# EAGLE board PCB_v52 (EAGLE 9.7.0)
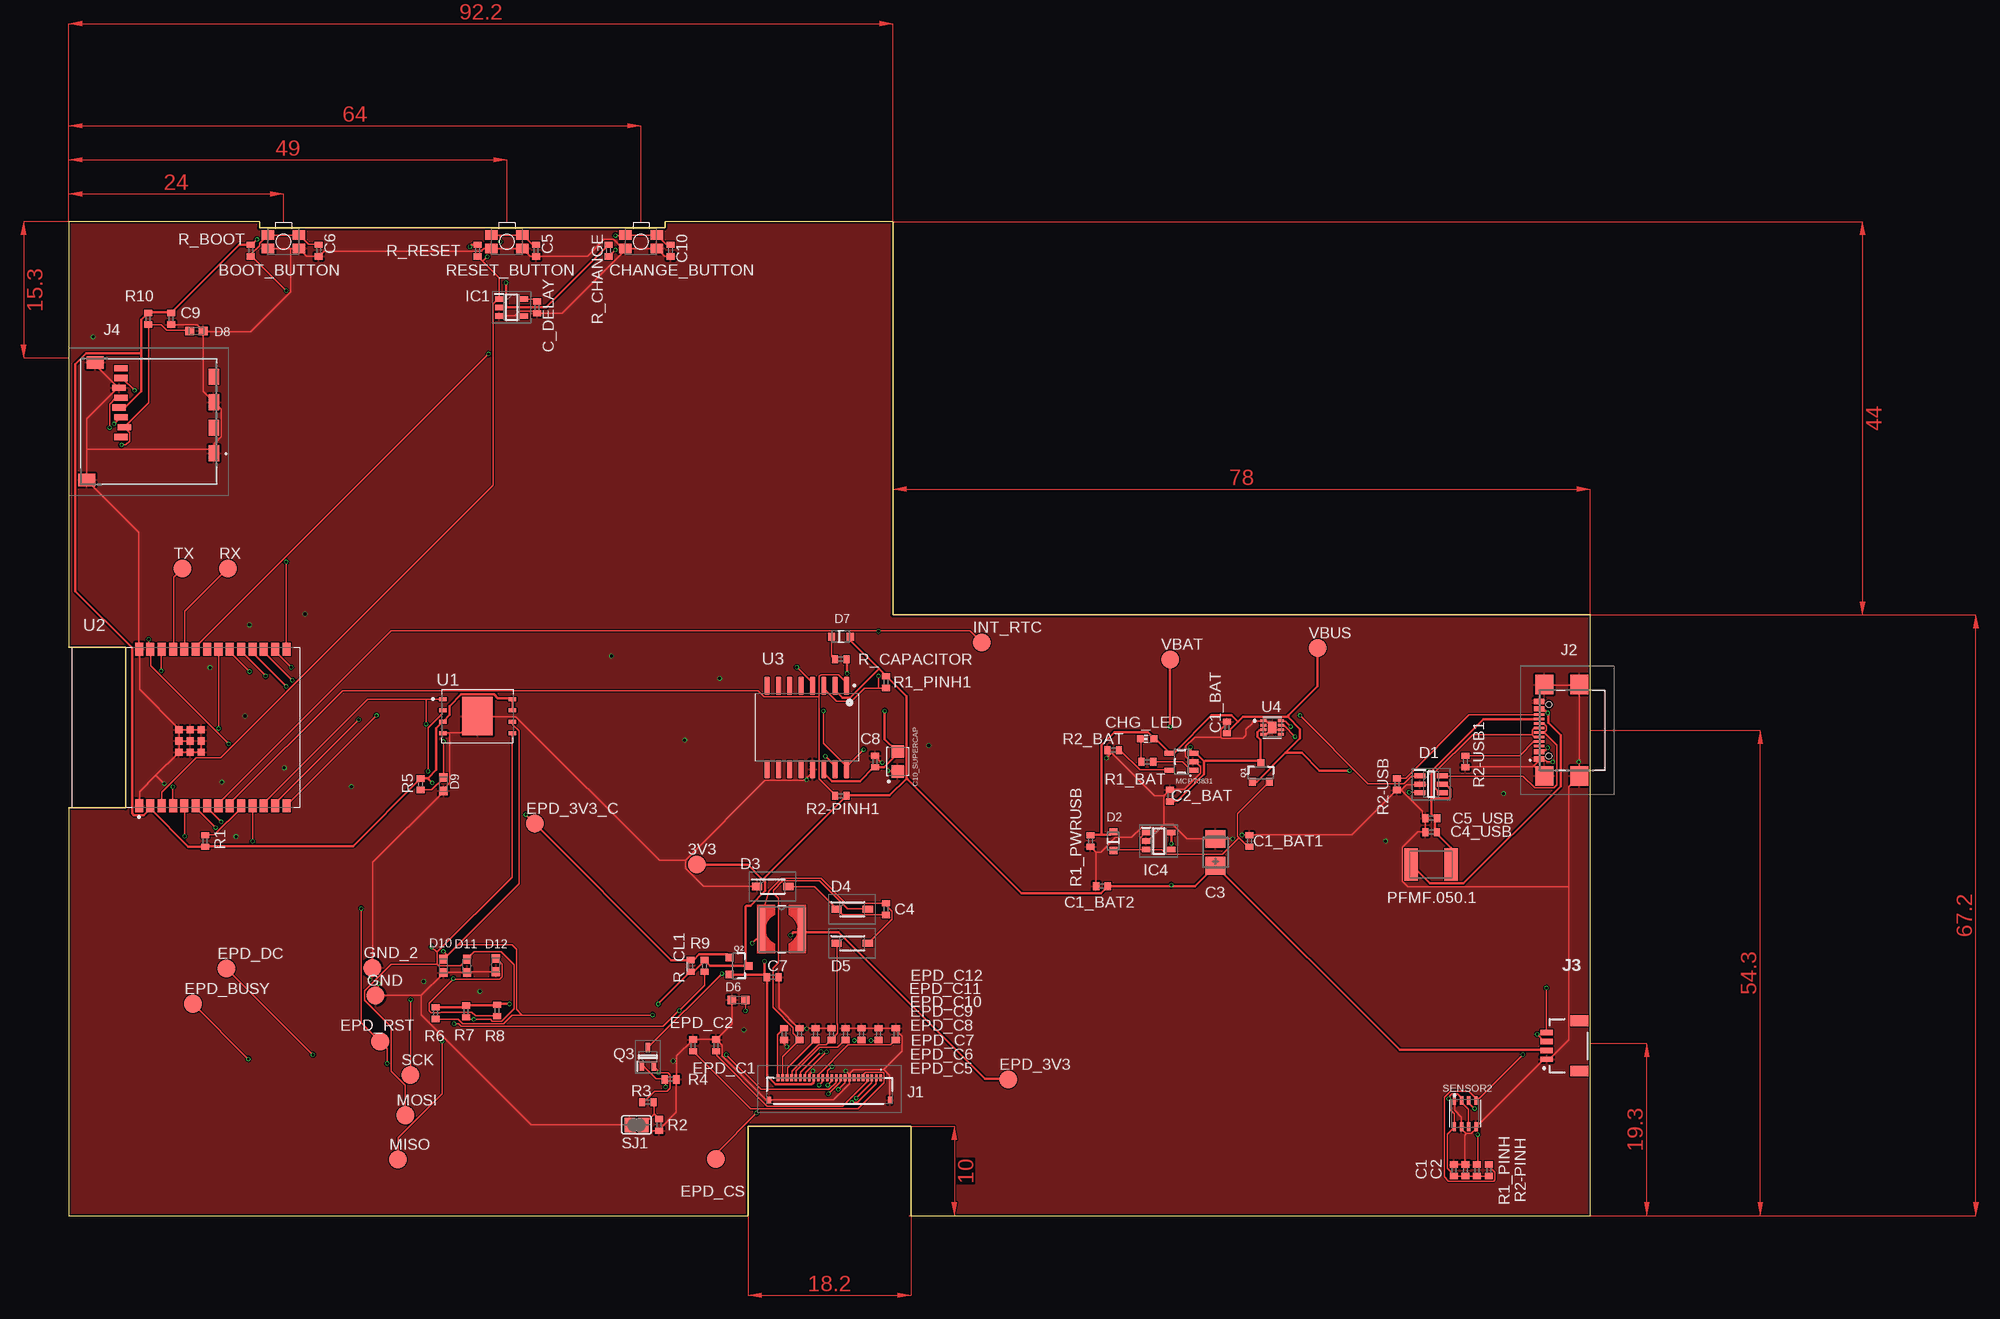
[diagram p0: board, top side]
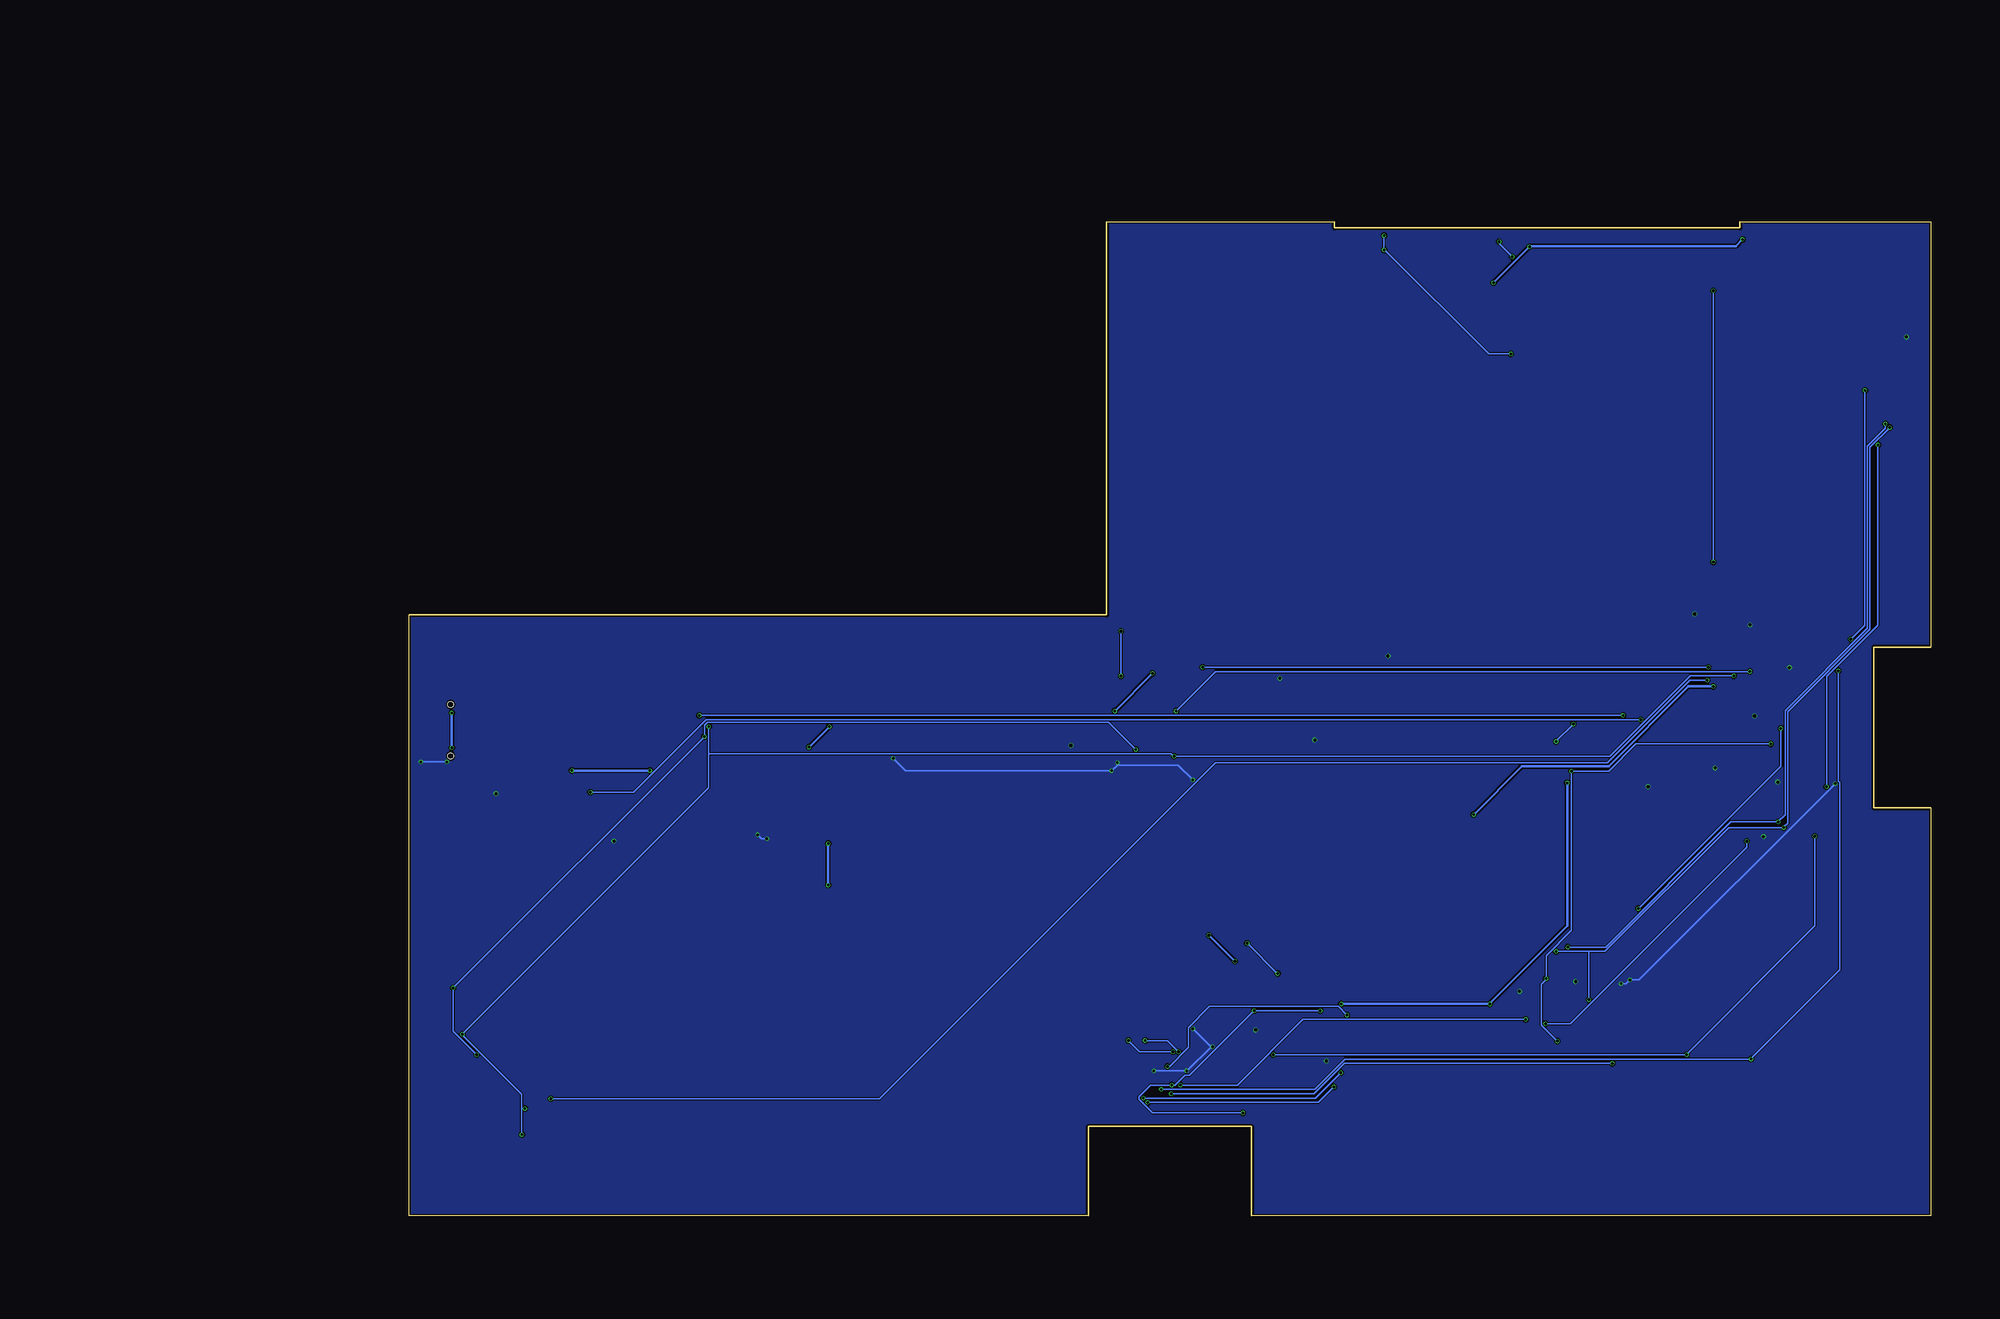
[diagram p1: board, bottom side, seen from below]

Size 170.2 x 111.2 mm. Coordinates in mm from the lower left corner, seen from the top.
Outline: 0,0 76,0 76,10 94.2,10 94.2,0 170.2,0 170.2,67.2 92.2,67.2 92.2,111.2 66.68,111.2 66.68,110.49 21.32,110.49 21.32,111.2 0,111.2 0,63.6 6.35,63.6 6.35,45.62 0,45.62 0,0
Copper layers (1*16): Top 0.035mm / dielectric 1.6mm / Bottom 0.035mm
Design rules "jlcpcb-2layers.dru": minimum track width 0.15mm, minimum drill 0.3mm, track to track 5mil, track to pad 5mil, pad to pad 5mil, via to via 5mil, smd to smd 5mil, copper to edge 0.2mm, drill to drill 6mil, minimum pad ring 10mil, minimum via ring 3mil, stop-mask expansion 4mil, vias tented up to drill 0mil, thermal gap 10mil
Net classes: 1 power: width 0.3 mm

## Footprints (pad centres in the part's own frame; a part is rotated, then mirrored left to right if it is on the bottom)
TP20R = smd 2 x 2: TP 0,0
MYBUTTON = smd 1.4 x 1.05: 1 1.75,0.75; 2 -1.75,0.75; 3 -1.75,-0.75; 4 1.75,-0.75
EAGLE-LTSPICE_C0402 = smd 0.7 x 0.9: 1 -0.65,0; 2 0.65,0
RCL_CT3528 = smd 2 x 2.2: + -1.5,0; - 1.5,0
CAPCP3225X100N = smd 1.4 x 1.4: 1 -1.1,0; 2 1.1,0
ADAFRUIT_CHIP-LED0603 = smd 0.8 x 0.8: A 0,-0.75; C 0,0.75
SOT95P280X145-6N = smd 1.2 x 0.6: 1 -1.25,0.95; 2 -1.25,0; 3 -1.25,-0.95; 4 1.25,-0.95; 5 1.25,0; 6 1.25,0.95
ESP32_WROVER_AVX---SD0805S020S1R0_AVX_SD0805S020S1R0_0 = smd 0.8 x 0.9: 1 -1.05,0; 2 1.05,0
SOD3716X135N = smd 1.15 x 0.8: 1 -1.75,0; 2 1.75,0
DIOC1608X36N = smd 0.97 x 0.94: 1 -0.75,0; 2 0.75,0
SOT95P280X125-5N = smd 0.9 x 0.6: 1 -1.4,0.95; 2 -1.4,0; 3 -1.4,-0.95; 4 1.4,-0.95; 5 1.4,0.95
SOT95P280X120-5N = smd 0.9 x 0.6: 1 -1.4,0.95; 2 -1.4,0; 3 -1.4,-0.95; 4 1.4,-0.95; 5 1.4,0.95
FH34SRJ24S05SH99 = smd 0.3 x 0.8: 1 5.75,1.45; 2 5.25,1.45; 3 4.75,1.45; 4 4.25,1.45; 5 3.75,1.45; 6 3.25,1.45; 7 2.75,1.45; 8 2.25,1.45; 9 1.75,1.45; 10 1.25,1.45; 11 0.75,1.45; 12 0.25,1.45; 13 -0.25,1.45; 14 -0.75,1.45; 15 -1.25,1.45; 16 -1.75,1.45; 17 -2.25,1.45; 18 -2.75,1.45; 19 -3.25,1.45; 20 -3.75,1.45; 21 -4.25,1.45; 22 -4.75,1.45; 23 -5.25,1.45; 24 -5.75,1.45 | smd 0.4 x 0.8: MP1 6.75,-1.05; MP2 -6.75,-1.05
SAMACSYS_PARTS_USB4110GFA = smd 0.3 x 1.15: A1 -3.35,3.678; A4 -2.55,3.678; A5 -1.25,3.678; A6 -0.25,3.678; A7 0.25,3.678; A8 1.25,3.678; A9 2.55,3.678; A12 3.35,3.678; B1 3.05,3.678; B4 2.25,3.678; B5 1.75,3.678; B6 0.75,3.678; B7 -0.75,3.678; B8 -1.75,3.678; B9 -2.25,3.678; B12 -3.05,3.678 | smd 2.18 x 2: MP1 -5.11,-0.827; MP2 5.11,-0.827; MP3 -5.11,3.103; MP4 5.11,3.103 | hole 0.65: -2.89,2.603; 2.89,2.603
JST04_1MM_RA = smd 0.6 x 1.35: 1 -1.5,0; 2 -0.5,0; 3 0.5,0; 4 1.5,0 | smd 1.2 x 2: NC1 2.8,-3.675; NC2 -2.8,-3.675
112ATAARR03ATTEND = smd 1.8 x 1.2: G1 10.6,10.4; G2 4.9,10.4; S1 7.75,10.4; S2 2.05,10.4 | smd 1.4 x 1.9: G3 13.6,-3.85; G4 0.45,-2.85 | smd 0.7 x 1.5: P1 8.8,0; P2 7.7,0.4; P3 6.6,0; P4 5.5,-0.2; P5 4.4,0; P6 3.3,-0.2; P7 2.2,0; P8 1.1,0
IND_4828-WE-TPC_WRE = smd 0.889 x 4.826: 1 -2.286,0; 2 2.286,0
ESP32_WROVER_SPARKFUN-IC-POWER_SOT23-5 = smd 0.55 x 1.2: 1 -0.95,-1.3; 2 0,-1.3; 3 0.95,-1.3; 4 0.95,1.3; 5 -0.95,1.3
ESP32C6_VARISTOR_CT/CN1812 = smd 1.5 x 3.6: 1 -2.25,0; 2 2.25,0
ESP32_WROVER_SPARKFUN-DISCRETESEMI_SOT23-3 = smd 0.8 x 0.9: 1 -0.95,-1; 2 0.95,-1; 3 0,1.1
SOT65P210X110-3N = smd 1.05 x 0.5: 1 -1.05,0.65; 2 -1.05,-0.65; 3 1.05,0
ESP32_WROVER_EAGLE-LTSPICE_R0402 = smd 0.7 x 0.9: 1 -0.65,0; 2 0.65,0
ESP32_WROVER_BME680_PSON80P300X300X100-8N = smd 1.016 x 0.5: 1 1.458,1.2; 2 1.458,0.4; 3 1.458,-0.4; 4 1.458,-1.2; 5 -1.458,-1.22; 6 -1.458,-0.4; 7 -1.458,0.4; 8 -1.458,1.2
SJ = smd 1.168 x 1.6: 1 -0.762,0; 2 0.762,0
SON127P600X800X80-9N = smd 0.94 x 0.44: 1 -3.895,1.905; 2 -3.895,0.635; 3 -3.895,-0.635; 4 -3.895,-1.905; 5 3.895,-1.905; 6 3.895,-0.635; 7 3.895,0.635; 8 3.895,1.905 | smd 3.4 x 4.3: 9 0,0
XCVR_ESP32-C6-WROOM-1-N8 = smd 1.5 x 0.9: 1 -8.75,5.26; 2 -8.75,3.99; 3 -8.75,2.72; 4 -8.75,1.45; 5 -8.75,0.18; 6 -8.75,-1.09; 7 -8.75,-2.36; 8 -8.75,-3.63; 9 -8.75,-4.9; 10 -8.75,-6.17; 11 -8.75,-7.44; 12 -8.75,-8.71; 13 -8.75,-9.98; 14 -8.75,-11.25; 15 8.75,-11.25; 16 8.75,-9.98; 17 8.75,-8.71; 18 8.75,-7.44; 19 8.75,-6.17; 20 8.75,-4.9; 21 8.75,-3.63; 22 8.75,-2.36; 23 8.75,-1.09; 24 8.75,0.18; 25 8.75,1.45; 26 8.75,2.72; 27 8.75,3.99; 28 8.75,5.26 | smd 0.8 x 0.8: 29_1 -2.755,0.79; 29_2 -1.505,0.79; 29_3 -0.255,0.79; 29_4 -2.755,-0.46; 29_5 -1.505,-0.46; 29_6 -0.255,-0.46; 29_7 -2.755,-1.71; 29_8 -1.505,-1.71; 29_9 -0.255,-1.71
SOIC127P1032X265-16N = smd 2.05 x 0.59: 1 -4.655,4.445; 2 -4.655,3.175; 3 -4.655,1.905; 4 -4.655,0.635; 5 -4.655,-0.635; 6 -4.655,-1.905; 7 -4.655,-3.175; 8 -4.655,-4.445; 9 4.655,-4.445; 10 4.655,-3.175; 11 4.655,-1.905; 12 4.655,-0.635; 13 4.655,0.635; 14 4.655,1.905; 15 4.655,3.175; 16 4.655,4.445
SON50P200X200X80-9N = smd 0.76 x 0.27: 1 -0.985,0.75; 4 -0.985,-0.75; 5 0.985,-0.75; 6 0.985,-0.25; 7 0.985,0.25; 8 0.985,0.75 | smd 0.785 x 0.302: 2 -0.985,0.25 | smd 0.787 x 0.305: 3 -0.985,-0.25 | smd 0.9 x 1.3: 9 0,0

## Placement (x,y rotation side)
3V3  TPTP20R  [TP20R]  70.24,39.31 0 top
BOOT_BUTTON  BUTTON_CUSYOMV1  [MYBUTTON]  24,108.94 180 top
C1  100nF  [EAGLE-LTSPICE_C0402]  154.94,5.08 90 top
C1_BAT  4.7uF  [EAGLE-LTSPICE_C0402]  129.54,54.61 90 top
C1_BAT1  4.7uF  [EAGLE-LTSPICE_C0402]  132.08,41.91 90 top
C1_BAT2  4.7uF  [EAGLE-LTSPICE_C0402]  115.57,36.83 180 top
C2  100nF  [EAGLE-LTSPICE_C0402]  156.21,5.08 90 top
C2_BAT  4.7uF  [EAGLE-LTSPICE_C0402]  123.19,46.99 90 top
C3  100uF TANT  [RCL_CT3528]  128.27,40.64 90 top
C4  4.7uF/25V  [EAGLE-LTSPICE_C0402]  91.44,34.29 90 top
C4_USB  100nF  [EAGLE-LTSPICE_C0402]  152.4,42.87 180 top
C5  1uF  [EAGLE-LTSPICE_C0402]  52.27,107.95 270 top
C5_USB  4.7uF  [EAGLE-LTSPICE_C0402]  152.42,44.45 180 top
C6  100nF  [EAGLE-LTSPICE_C0402]  27.94,107.95 270 top
C7  10uF  [EAGLE-LTSPICE_C0402]  78.74,26.67 0 top
C8  100nF  [EAGLE-LTSPICE_C0402]  90.17,50.8 90 top
C9  100nF  [EAGLE-LTSPICE_C0402]  11.43,100.33 270 top
C10  100nF  [EAGLE-LTSPICE_C0402]  67.31,107.95 270 top
C10_SUPERCAP  CPH3225A  [CAPCP3225X100N]  92.71,50.8 90 top
C_DELAY  100nF  [EAGLE-LTSPICE_C0402]  52.37,101.6 270 top
CHANGE_BUTTON  BUTTON_CUSYOMV1  [MYBUTTON]  64,108.94 180 top
CHG_LED  [ADAFRUIT_CHIP-LED0603]  120.65,53.34 90 top
D1  USBLC6-2SC6Y  [SOT95P280X145-6N]  152.4,48.26 0 top
D2  ESP32_WROVER_AVX---SD0805S020S1R0_AVX_SD0805S020S1R0_0_0AVX_SD0805S020S1R0_0_0  [ESP32_WROVER_AVX---SD0805S020S1R0_AVX_SD0805S020S1R0_0]  116.84,41.91 90 top
D3  MBR0530  [SOD3716X135N]  78.74,36.83 0 top
D4  MBR0530  [SOD3716X135N]  87.63,34.29 0 top
D5  MBR0530  [SOD3716X135N]  87.63,30.48 0 top
D6  PGB1010603MR  [DIOC1608X36N]  74.93,24.13 0 top
D7  ESP32_WROVER_AVX---SD0805S020S1R0_AVX_SD0805S020S1R0_0_0AVX_SD0805S020S1R0_0_0  [ESP32_WROVER_AVX---SD0805S020S1R0_AVX_SD0805S020S1R0_0]  86.36,64.77 0 top
D8  PGB1010603MR  [DIOC1608X36N]  14.27,98.96 180 top
D9  PGB1010603MR  [DIOC1608X36N]  41.91,48.26 90 top
D10  PGB1010603MR  [DIOC1608X36N]  41.91,27.94 90 top
D11  PGB1010603MR  [DIOC1608X36N]  44.55,27.94 90 top
D12  PGB1010603MR  [DIOC1608X36N]  47.79,28.04 90 top
EPD_3V3  TPTP20R  [TP20R]  105.07,15.24 0 top
EPD_3V3_C  TPTP20R  [TP20R]  52.13,43.86 0 top
EPD_BUSY  TPTP20R  [TP20R]  13.9,23.71 0 top
EPD_C1  1uF/50V  [EAGLE-LTSPICE_C0402]  72.39,19.05 90 top
EPD_C2  1uF/50V  [EAGLE-LTSPICE_C0402]  69.85,19.05 90 top
EPD_C5  0.1uF/50V  [EAGLE-LTSPICE_C0402]  92.51,20.32 90 top
EPD_C6  1uF/50V  [EAGLE-LTSPICE_C0402]  90.57,20.32 90 top
EPD_C7  1uF/50V  [EAGLE-LTSPICE_C0402]  88.7,20.32 90 top
EPD_C8  1uF/50V  [EAGLE-LTSPICE_C0402]  86.87,20.32 90 top
EPD_C9  1uF/50V  [EAGLE-LTSPICE_C0402]  85.3,20.32 90 top
EPD_C10  1uF/50V  [EAGLE-LTSPICE_C0402]  83.55,20.32 90 top
EPD_C11  1uF/50V  [EAGLE-LTSPICE_C0402]  81.72,20.32 90 top
EPD_C12  1uF/50V  [EAGLE-LTSPICE_C0402]  80.01,20.32 90 top
EPD_CS  TPTP20R  [TP20R]  72.39,6.35 0 top
EPD_DC  TPTP20R  [TP20R]  17.6,27.64 0 top
EPD_RST  TPTP20R  [TP20R]  34.82,19.51 0 top
GND  TPTP20R  [TP20R]  34.31,24.63 0 top
GND_2  TPTP20R  [TP20R]  33.95,27.73 0 top
IC1  BD5229G-TR  [SOT95P280X125-5N]  49.53,101.6 0 top
IC4  XC6220A331MR-G  [SOT95P280X120-5N]  121.92,41.91 0 top
INT_RTC  TPTP20R  [TP20R]  102.13,64.13 0 top
J1  FH34SRJ-24S-0.5SH_99_  [FH34SRJ24S05SH99]  85.09,13.97 0 top
J2  SAMACSYS_PARTS_USB4110-GF-A  [SAMACSYS_PARTS_USB4110GFA]  168.17,54.3 90 top
J3  QWIIC_RIGHT_ANGLE  [JST04_1MM_RA]  165.32,19 90 top
J4  112A-TAAR-R03_ATTEND  [112ATAARR03ATTEND]  5.82,95.9 270 top
L1  68uH  [IND_4828-WE-TPC_WRE]  79.74,32.05 0 top
MCP73831  ESP32_WROVER_SPARKFUN-IC-POWER_MCP73831  [ESP32_WROVER_SPARKFUN-IC-POWER_SOT23-5]  124.46,50.8 90 top
MISO  TPTP20R  [TP20R]  36.81,6.28 0 top
MOSI  TPTP20R  [TP20R]  37.62,11.24 0 top
PFMF.050.1  ESP32C6_VARISTORCN1812  [ESP32C6_VARISTOR_CT/CN1812]  152.4,39.3 0 top
Q1  20V/4.2A/52mΩ/1.4W  [ESP32_WROVER_SPARKFUN-DISCRETESEMI_SOT23-3]  133.35,49.53 0 top
Q2  20V/4.2A/52mΩ/1.4W  [ESP32_WROVER_SPARKFUN-DISCRETESEMI_SOT23-3]  74.93,27.94 270 top
Q3  SI1308EDL-T1-GE3  [SOT65P210X110-3N]  64.77,17.78 90 top
R1  10k  [ESP32_WROVER_EAGLE-LTSPICE_R0402]  15.24,41.91 270 top
R1_BAT  200  [ESP32_WROVER_EAGLE-LTSPICE_R0402]  120.65,50.8 0 top
R1_PINH  10k  [ESP32_WROVER_EAGLE-LTSPICE_R0402]  157.54,5.08 270 top
R1_PINH1  10k  [ESP32_WROVER_EAGLE-LTSPICE_R0402]  91.44,59.69 90 top
R1_PWRUSB  100k  [ESP32_WROVER_EAGLE-LTSPICE_R0402]  114.3,41.91 90 top
R2  2.2  [ESP32_WROVER_EAGLE-LTSPICE_R0402]  66.04,10.16 90 top
R2-PINH  10k  [ESP32_WROVER_EAGLE-LTSPICE_R0402]  158.87,5.08 270 top
R2-PINH1  10k  [ESP32_WROVER_EAGLE-LTSPICE_R0402]  86.36,46.99 0 top
R2-USB  5k1  [ESP32_WROVER_EAGLE-LTSPICE_R0402]  148.59,48.26 270 top
R2-USB1  5K1  [ESP32_WROVER_EAGLE-LTSPICE_R0402]  156.21,50.8 90 top
R2_BAT  2k  [ESP32_WROVER_EAGLE-LTSPICE_R0402]  116.84,52.07 0 top
R3  0.47  [ESP32_WROVER_EAGLE-LTSPICE_R0402]  64.77,12.7 180 top
R4  10k  [ESP32_WROVER_EAGLE-LTSPICE_R0402]  67.31,15.24 180 top
R5  10K  [ESP32_WROVER_EAGLE-LTSPICE_R0402]  39.37,48.26 90 top
R6  10K  [ESP32_WROVER_EAGLE-LTSPICE_R0402]  41.01,22.66 90 top
R7  10K  [ESP32_WROVER_EAGLE-LTSPICE_R0402]  44.45,22.86 90 top
R8  10K  [ESP32_WROVER_EAGLE-LTSPICE_R0402]  47.89,22.96 90 top
R9  10K  [ESP32_WROVER_EAGLE-LTSPICE_R0402]  71.12,27.94 90 top
R10  10K  [ESP32_WROVER_EAGLE-LTSPICE_R0402]  8.89,100.33 90 top
R_BOOT  10k  [ESP32_WROVER_EAGLE-LTSPICE_R0402]  20.32,107.95 90 top
R_CAPACITOR  15  [ESP32_WROVER_EAGLE-LTSPICE_R0402]  86.36,62.23 0 top
R_CHANGE  10k  [ESP32_WROVER_EAGLE-LTSPICE_R0402]  60.4,107.95 90 top
R_CL1  10k  [ESP32_WROVER_EAGLE-LTSPICE_R0402]  69.54,27.94 270 top
R_RESET  10k  [ESP32_WROVER_EAGLE-LTSPICE_R0402]  45.72,107.95 90 top
RESET_BUTTON  BUTTON_CUSYOMV1  [MYBUTTON]  49,108.94 180 top
RX  TPTP20R  [TP20R]  17.78,72.39 0 top
SCK  TPTP20R  [TP20R]  38.22,15.75 0 top
SENSOR2  ESP32_WROVER_BME680_BME680  [ESP32_WROVER_BME680_PSON80P300X300X100-8N]  156.21,11.43 90 top
SJ1  [SJ]  63.5,10.16 0 top
TX  TPTP20R  [TP20R]  12.7,72.39 0 top
U1  W25Q512JVEIQ  [SON127P600X800X80-9N]  45.72,55.88 0 top
U2  ESP32-C6-WROOM-1-N8  [XCVR_ESP32-C6-WROOM-1-N8]  13.1,54.61 90 top
U3  DS3231SN#  [SOIC127P1032X265-16N]  82.55,54.61 270 top
U4  MAX17048G+T10  [SON50P200X200X80-9N]  134.62,54.61 0 top
VBAT  TPTP20R  [TP20R]  123.19,62.23 0 top
VBUS  TPTP20R  [TP20R]  139.7,63.5 0 top

## Library data of the parts
3V3 BOOT_BUTTON CHANGE_BUTTON CHG_LED EPD_3V3 EPD_3V3_C EPD_BUSY EPD_CS EPD_DC EPD_RST GND GND_2 INT_RTC MISO MOSI PFMF.050.1 RESET_BUTTON RX SCK SJ1 TX VBAT VBUS = DeskAssistant v19 v1
C1 C1_BAT C1_BAT1 C1_BAT2 C2 C2_BAT C4 C4_USB C5 C5_USB C6-C10 C_DELAY EPD_C1 EPD_C2 EPD_C5-EPD_C12 = DeskAssistant v19 v1; SPICEMODEL: NONE; SPICEPREFIX: C
C3 = DeskAssistant v19 v1; SPICEPREFIX: C
C10_SUPERCAP = DeskAssistant v19 v1; AVAILABILITY: Not in stock; CHECK_PRICES: https://www.snapeda.com/parts/CPH3225A/Seiko+Instruments/view-part/?ref=eda; DESCRIPTION: 11 mF (EDLC) Supercapacitor 3.3 V 1210 (3225 Metric) - -; MF: Seiko Instruments; MP: CPH3225A; PACKAGE: 1210 Seiko; PRICE: None; PURCHASE-URL: https://www.snapeda.com/api/url_track_click_mouser/?unipart_id=562593&manufacturer=Seiko Instruments&part_name=CPH3225A&search_term=None; SNAPEDA_LINK: https://www.snapeda.com/parts/CPH3225A/Seiko+Instruments/view-part/?ref=snap
D1 = DeskAssistant v19 v1; AVAILABILITY: In Stock; CHECK_PRICES: https://www.snapeda.com/parts/USBLC6-2SC6Y/STMicroelectronics/view-part/?ref=eda; DESCRIPTION: 17V Clamp 5A (8/20µs) Ipp Tvs Diode Surface Mount SOT-23-6; MF: STMicroelectronics; MP: USBLC6-2SC6Y; PACKAGE: SOT-23-6 STMicroelectronics; PRICE: None; SNAPEDA_LINK: https://www.snapeda.com/parts/USBLC6-2SC6Y/STMicroelectronics/view-part/?ref=snap
D2 D7 = DeskAssistant v19 v1; CENTROID_NOT_SPECIFIED: No; DATASHEET: http://datasheets.avx.com/schottky.pdf; DIGIKEY_DESCRIPTION: DIODE SCHOTTKY 20V 1A 0805; DIGIKEY_PART_NUMBER: 478-7800-1-ND; LEAD_FREE: yes; MF: AVX; MOUSER_PART_NUMBER: 581-SD0805S020S1R0; PACKAGE: 0805 (2012 metric); PREFIX: D; ROHS: yes; TEMPERATURE_RANGE_HIGH: +125°C; TEMPERATURE_RANGE_LOW: -55°C
D3-D5 = DeskAssistant v19 v1; AVAILABILITY: In Stock; CHECK_PRICES: https://www.snapeda.com/parts/MBR0530/Onsemi/view-part/?ref=eda; DESCRIPTION: Diode Schottky 30 V 500mA Surface Mount SOD-123; MF: ON Semiconductor; MP: MBR0530; PACKAGE: SOD-123-2 ON Semiconductor; PRICE: None; PURCHASE-URL: https://www.snapeda.com/api/url_track_click_mouser/?unipart_id=179458&manufacturer=ON Semiconductor&part_name=MBR0530&search_term=None; SNAPEDA_LINK: https://www.snapeda.com/parts/MBR0530/Onsemi/view-part/?ref=snap
D6 D8-D12 = DeskAssistant v19 v1; AVAILABILITY: In Stock; CHECK_PRICES: https://www.snapeda.com/parts/PGB1010603MR/Littelfuse/view-part/?ref=eda; DESCRIPTION: 150V (Typ) Clamp - Ipp Tvs Diode Surface Mount 0603 (1608 Metric); MF: Littelfuse Inc.; MP: PGB1010603MR; PACKAGE: 0603 Littelfuse Inc.; PRICE: None; PURCHASE-URL: https://www.snapeda.com/api/url_track_click_mouser/?unipart_id=5659453&manufacturer=Littelfuse Inc.&part_name=PGB1010603MR&search_term=None; SNAPEDA_LINK: https://www.snapeda.com/parts/PGB1010603MR/Littelfuse/view-part/?ref=snap
IC1 = DeskAssistant v19 v1; DESCRIPTION: Voltage Detector with Adjustable Delay Time: CMOS processes are utilized to develop high precision, low current consumption CMOS reset ICs that allow arbitrary setting of the delay time. The extensive lineup includes both Nch Open Drain and CMOS output types in a wide range of detection voltages (from 2.3V to 6.0V, in 0.1V steps), enabling selection of the ideal solution based on customer requirements. In addition, the entire series is of course both lead-free and RoHS-compliant.; HEIGHT: 1.25mm; MANUFACTURER_NAME: ROHM Semiconductor; MANUFACTURER_PART_NUMBER: BD5229G-TR; MOUSER_PART_NUMBER: 755-BD5229G-TR; MOUSER_PRICE-STOCK: https://www.mouser.co.uk/ProductDetail/ROHM-Semiconductor/BD5229G-TR?qs=4kLU8WoGk0vvnhrrYwdszw%3D%3D
IC4 = DeskAssistant v19 v1; DESCRIPTION: LDO Voltage Regulators; HEIGHT: 1.2mm; MANUFACTURER_NAME: Torex; MANUFACTURER_PART_NUMBER: XC6220A331MR-G; MOUSER_PART_NUMBER: 865-XC6220A331MR-G; MOUSER_PRICE-STOCK: https://www.mouser.co.uk/ProductDetail/Torex-Semiconductor/XC6220A331MR-G?qs=AsjdqWjXhJ8ZSWznL1J0gg%3D%3D
J1 = DeskAssistant v19 v1; DESCRIPTION: 24 Position FFC, FPC Connector Contacts, Top and Bottom 0.020" (0.50mm) Surface Mount, Right Angle; HEIGHT: 1.1mm; MANUFACTURER_NAME: Hirose; MANUFACTURER_PART_NUMBER: FH34SRJ-24S-0.5SH(99); MOUSER_PART_NUMBER: 798-FH34SRJ24S05SH99; MOUSER_PRICE-STOCK: https://www.mouser.co.uk/ProductDetail/Hirose-Connector/FH34SRJ-24S-0.5SH99?qs=vcbW%252B4%252BSTIpKBl5ap9J8Fw%3D%3D
J2 = DeskAssistant v19 v1; DESCRIPTION: CONN USB 2.0 TYPE-C R/A SMT; HEIGHT: 3.26mm; MANUFACTURER_NAME: GCT (GLOBAL CONNECTOR TECHNOLOGY); MANUFACTURER_PART_NUMBER: USB4110-GF-A; MOUSER_PART_NUMBER: 640-USB4110-GF-A; MOUSER_PRICE-STOCK: https://www.mouser.co.uk/ProductDetail/GCT/USB4110-GF-A?qs=KUoIvG%2F9IlYiZvIXQjyJeA%3D%3D
J3 = DeskAssistant v19 v1; PROD_ID: CONN-13694
J4 = DeskAssistant v19 v1; DESCRIPTION: Micro SD Card Socket, Push-Push Type, Top Mount, SMT, H=1.83mm, 10u; HEIGHT: 1.9mm; MANUFACTURER_NAME: ATTEND; MANUFACTURER_PART_NUMBER: 112A-TAAR-R03 ATTEND
L1 = DeskAssistant v19 v1; COPYRIGHT: Copyright (C) 2024 Ultra Librarian. All rights reserved.; MANUFACTURER_PART_NUMBER: 744043680; MFR_NAME: Wurth Electronics
MCP73831 = DeskAssistant v19 v1; PROD_ID: IC-09995
Q1 Q2 = DeskAssistant v19 v1; PROD_ID: TRAN-14388
Q3 = DeskAssistant v19 v1; AVAILABILITY: In Stock; CHECK_PRICES: https://www.snapeda.com/parts/SI1308EDL-T1-GE3/Vishay+Siliconix/view-part/?ref=eda; DESCRIPTION: Si1308EDL-T1-GE3 N-channel MOSFET Transistor, 1.5 A, 30 V, 3-Pin SC-70 | Siliconix / Vishay SI1308EDL-T1-GE3; MF: Vishay Siliconix; MP: SI1308EDL-T1-GE3; PACKAGE: SOT-323 Vishay Semiconductor; PRICE: None; PURCHASE-URL: https://www.snapeda.com/api/url_track_click_mouser/?unipart_id=274603&manufacturer=Vishay Siliconix&part_name=SI1308EDL-T1-GE3&search_term=None; SNAPEDA_LINK: https://www.snapeda.com/parts/SI1308EDL-T1-GE3/Vishay+Siliconix/view-part/?ref=snap
R1 R1_BAT R1_PINH R1_PINH1 R1_PWRUSB R2 R2-PINH R2-PINH1 R2-USB R2-USB1 R2_BAT R3-R10 R_BOOT R_CAPACITOR R_CHANGE R_CL1 R_RESET = DeskAssistant v19 v1; SPICEMODEL: NONE; SPICEPREFIX: R
SENSOR2 = DeskAssistant v19 v1; AVAILABILITY: Unavailable; DESCRIPTION: Integrated Environmental Unit; MF: Bosch Sensortec; MP: BME680; PACKAGE: LGA-8 Bosch Tools; PRICE: None
U1 = DeskAssistant v19 v1; AVAILABILITY: In Stock; CHECK_PRICES: https://www.snapeda.com/parts/W25Q512JVEIQ/Winbond+Electronics/view-part/?ref=eda; DESCRIPTION: FLASH - NOR Memory IC 512Mb (64M x 8) SPI - Quad I/O 133 MHz 8-WSON (8x6); MF: Winbond Electronics; MP: W25Q512JVEIQ; PACKAGE: Package; PRICE: None; SNAPEDA_LINK: https://www.snapeda.com/parts/W25Q512JVEIQ/Winbond+Electronics/view-part/?ref=snap
U2 = DeskAssistant v19 v1; AVAILABILITY: In Stock; CHECK_PRICES: https://www.snapeda.com/parts/ESP32-C6-WROOM-1-N8/Espressif+Systems/view-part/?ref=eda; DESCRIPTION: Multiprotocol Modules ESP32-C6 module, Wi-Fi 6 in 2.4 GHz band, Bluetooth 5, Zigbee 3.0 and Thread. ESP34-WROOM Compatible - ENGINEERING SAMPLE; MF: Espressif Systems; MP: ESP32-C6-WROOM-1-N8; PACKAGE: None; PRICE: None; SNAPEDA_LINK: https://www.snapeda.com/parts/ESP32-C6-WROOM-1-N8/Espressif+Systems/view-part/?ref=snap
U3 = DeskAssistant v19 v1; AVAILABILITY: In Stock; CHECK_PRICES: https://www.snapeda.com/parts/DS3231SN%23/Analog+Devices/view-part/?ref=eda; DESCRIPTION: Extremely Accurate I²C-Integrated RTC/TCXO/Crystal; MF: Analog Devices; MP: DS3231SN#; PACKAGE: SOIC-16 Maxim; PRICE: None; PURCHASE-URL: https://www.snapeda.com/api/url_track_click_mouser/?unipart_id=99048&manufacturer=Analog Devices&part_name=DS3231SN#&search_term=None; SNAPEDA_LINK: https://www.snapeda.com/parts/DS3231SN%23/Analog+Devices/view-part/?ref=snap
U4 = DeskAssistant v19 v1; AVAILABILITY: In Stock; CHECK_PRICES: https://www.snapeda.com/parts/MAX17048G+T10/Analog+Devices/view-part/?ref=eda; DESCRIPTION: 3µA 1-Cell/2-Cell Fuel Gauge with ModelGauge; MF: Analog Devices; MP: MAX17048G+T10; PACKAGE: TDFN-8 Maxim; PRICE: None; PURCHASE-URL: https://www.snapeda.com/api/url_track_click_mouser/?unipart_id=329239&manufacturer=Analog Devices&part_name=MAX17048G+T10&search_term=None; SNAPEDA_LINK: https://www.snapeda.com/parts/MAX17048G+T10/Analog+Devices/view-part/?ref=snap

## Nets
3V3 [power]: 3V3.TP C1_BAT2.1 C3.+ C9.1 D7.2 IC1.2 IC4.5 J3.2 J4.P4 Q2.3 R1.2 R1_PINH1.2 R2-PINH1.2 R5.2 R6.2 R7.2 R8.2 R9.2 R10.2 R_BOOT.2 R_CHANGE.2 R_CL1.2 R_RESET.2 U1.3 U1.7 U1.8 U2.2 U3.2
32KHZ: R2-PINH1.1 U2.9 U3.1
DN: D1.4 J2.A7 J2.B7
DP: D1.6 J2.A6 J2.B6
EPD_3V3 [power]: C7.1 EPD_3V3.TP J1.16 L1.2 Q2.2
EPD_3V3_C [power]: EPD_3V3_C.TP Q2.1 R_CL1.1 U2.18
EPD_BUSY: EPD_BUSY.TP J1.9 U2.26
EPD_CS: D6.2 EPD_CS.TP J1.12 R9.1 U2.11
EPD_DC: EPD_DC.TP J1.11 U2.5
EPD_RST: EPD_RST.TP J1.10 U2.21
FLASH_CS: D9.2 R5.1 U1.1 U2.12
GDR: J1.2 Q3.1 R4.2
GND: BOOT_BUTTON.1 BOOT_BUTTON.2 C1.2 C1_BAT1.2 C1_BAT2.2 C1_BAT.2 C2.2 C2_BAT.2 C3.- C4_USB.2 C5.2 C5_USB.2 C6.2 C7.2 C8.2 C9.2 C10.2 C10_SUPERCAP.1 C_DELAY.2 CHANGE_BUTTON.1 CHANGE_BUTTON.2 D1.2 D3.1 D6.1 D8.1 D9.1 D10.1 D11.1 D12.1 EPD_C1.2 EPD_C2.2 EPD_C5.2 EPD_C6.2 EPD_C7.2 EPD_C8.2 EPD_C9.2 EPD_C10.2 EPD_C11.2 EPD_C12.1 GND.TP GND_2.TP IC1.3 IC4.2 J1.8 J1.17 J1.MP1 J1.MP2 J2.A1 J2.A12 J2.B1 J2.B12 J2.MP1 J2.MP2 J2.MP3 J2.MP4 J3.1 J4.G1 J4.G2 J4.G3 J4.G4 J4.P6 MCP73831.2 R1_PWRUSB.1 R2-USB1.1 R2-USB.2 R2.1 R2_BAT.1 R4.1 RESET_BUTTON.1 RESET_BUTTON.2 SENSOR2.1 SENSOR2.5 SENSOR2.7 SJ1.1 U1.4 U1.9 U2.1 U2.28 U2.29_1 U2.29_2 U2.29_3 U2.29_4 U2.29_5 U2.29_6 U2.29_7 U2.29_8 U2.29_9 U3.13 U4.1 U4.4 U4.6 U4.9
GPIO8: R1.1 U2.10
I2C_PW: C1.1 C2.1 R1_PINH.2 R2-PINH.2 SENSOR2.2 SENSOR2.6 SENSOR2.8 U2.17
INT_RTC: INT_RTC.TP R1_PINH1.1 U2.8 U3.3
IO/BOOT: BOOT_BUTTON.3 BOOT_BUTTON.4 C6.1 R_BOOT.1 U2.15
IO/CHANGE: C10.1 CHANGE_BUTTON.3 CHANGE_BUTTON.4 R_CHANGE.1 U2.23
MISO: D12.2 J4.P7 MISO.TP R8.1 U1.2 U2.27
MOSI: D11.2 J1.14 J4.P3 MOSI.TP R7.1 U1.5 U2.7
N$1: C_DELAY.1 IC1.5
N$2: J2.B5 R2-USB.1
N$3: J2.A5 R2-USB1.2
N$5: D7.1 R_CAPACITOR.1
N$6: C1_BAT1.1 D2.1 IC4.1 IC4.3 Q1.2
N$9: MCP73831.1 R1_BAT.2
N$10: CHG_LED.C R1_BAT.1
N$11: C4.1 D3.2 D4.1
N$12: MCP73831.5 R2_BAT.2
N$13: EPD_C12.2 J1.24
N$15: EPD_C10.1 J1.22
N$17: EPD_C8.1 J1.20
N$18: EPD_C7.1 J1.19
N$19: EPD_C6.1 J1.18
N$20: EPD_C5.1 J1.15
N$21: EPD_C1.1 J1.4
N$22: EPD_C2.1 J1.5
PREVGH: D5.1 EPD_C9.1 J1.21
PREVGL: D4.2 EPD_C11.1 J1.23
RESE: J1.3 Q3.2 R3.2
RESE': R2.2 R3.1 SJ1.2
RESET: C5.1 IC1.1 R_RESET.1 RESET_BUTTON.3 RESET_BUTTON.4 U2.3
RTC_RST: U2.16 U3.4
RX: RX.TP U2.24
SCK: D10.2 J1.13 J4.P5 R6.1 SCK.TP U1.6 U2.6
SCL: J3.4 R2-PINH.1 SENSOR2.4 U2.20 U3.16 U4.7
SDA: J3.3 R1_PINH.1 SENSOR2.3 U2.19 U3.15 U4.8
SRC: C4.2 D5.2 L1.1 Q3.3
SS_SD: D8.2 J4.P2 R10.1 U2.4
TX: TX.TP U2.25
USB_D+: D1.1 U2.14
USB_D-: D1.3 U2.13
VBAT [power]: C2_BAT.1 MCP73831.3 Q1.3 U4.2 U4.3 VBAT.TP
VBUS [power]: C1_BAT.1 C4_USB.1 C5_USB.1 CHG_LED.A D1.5 D2.2 J2.A8 MCP73831.4 PFMF.050.1.2 Q1.1 R1_PWRUSB.2 VBUS.TP
VRTC [power]: C8.1 C10_SUPERCAP.2 R_CAPACITOR.2 U3.14
VUSB [power]: J2.A4 J2.A9 J2.B4 J2.B9 PFMF.050.1.1

## Tracks (layer width: path | path; a pad name or v marks a point on that pad's centre or on a via)
3V3  (via drill 0.3)
  Top 0.3: 48.89,101.59 53.39,101.59 60.39,108.58 R_CHANGE.2 | 48.89,101.59 48.2,101.59 IC1.2 | v44.87,108.38 45.08,108.58 45.7,108.58 R_RESET.2 | 48.89,101.59 v48.89,104.36 | 8.1,96.47 8.1,100.2 8.79,100.9 R10.2 8.93,101.04 11.43,101.04 C9.1 11.56,101.11 19.04,108.58 20.29,108.58 R_BOOT.2 20.43,108.58 v21.05,109.21 | 8.1,96.47 8.1,92.24 6.3,90.44 5.68,90.44 J4.P4 | 123.33,36.84 125.97,36.84 128.25,39.13 C3.+ 128.39,39.06 148.89,18.56 165.3,18.56 J3.2 | 123.33,36.84 116.27,36.84 C1_BAT2.1 116.13,36.77 115.44,36.08 106.58,36.08 93.83,48.82 93.69,48.89 | v123.33,41.62 123.33,42.8 IC4.5 | v123.33,36.98 123.33,36.84 | U1.7 49.65,56.58 49.65,57.76 U1.8 49.51,57.89 47.99,57.89 47.58,58.31 43.9,58.31 42.59,56.99 42.59,56.02 41.9,55.33 U1.3 41.76,55.19 41.06,54.5 41.06,49.86 40.16,48.96 | 40.16,48.96 39.4,48.96 R5.2 39.27,48.82 31.79,41.34 15.37,41.34 R1.2 15.23,41.27 13.37,41.27 9.14,45.5 9.14,45.84 U2.2 9,45.43 8.38,44.8 7.27,44.8 7.06,45.01 7.06,63.5 0.69,69.87 0.69,95.22 1.94,96.47 8.1,96.47 | 93.69,48.89 91.83,47.02 87.05,47.02 R2-PINH1.2 86.91,46.88 77.63,37.6 | 93.69,48.89 93.69,58.1 91.48,60.32 R1_PINH1.2 91.34,60.45 90.61,61.18 | 90.61,61.18 87.46,64.33 87.46,64.75 D7.2 | 90.61,61.18 87.39,57.96 86.56,57.96 85.73,58.79 85.73,59.21 U3.2 | R6.2 41.06,23.34 44.25,23.34 44.39,23.48 R7.2 44.6,23.55 47.85,23.55 R8.2 47.99,23.68 v49.31,23.68 | 77.63,37.6 77.91,37.33 77.91,36.36 76.24,34.69 75.83,34.69 75.69,34.56 75.69,28.12 Q2.3 75.97,27.98 71.74,27.98 71.26,28.46 R9.2 71.12,28.53 69.94,27.35 69.6,27.35 R_CL1.2 69.46,27.21 v65.93,23.68 | 77.63,37.6 75.97,39.27 70.29,39.27 3V3.TP
  Top 0.3: v40.65,48.41 40.23,48.82 40.16,48.96
  Bottom 0.3: v48.89,104.36 v44.87,108.38 44.74,108.44 21.81,108.44 v21.05,109.21 | v123.33,36.98 v123.33,41.62 | v65.93,23.68 v49.31,23.68 49.24,23.82 40.65,32.41 v40.65,48.41
32KHZ
  Top 0.15: 83.93,58.03 83.93,60.32 84.14,60.52 86.08,60.52 86.98,59.62 86.98,59.28 U3.1 | 83.93,58.03 83.93,48.89 85.66,47.16 85.66,47.02 R2-PINH1.1 | 83.93,58.03 77.77,58.03 77.08,58.72 30.61,58.72 18,46.12 18,45.91 U2.9
DN
  Top 0.15: 163.71,53.81 163.91,53.6 164.47,53.6 J2.B7 | 163.71,53.81 163.71,54.29 163.91,54.5 164.47,54.5 J2.A7 | 163.71,53.81 157.06,53.81 152.84,49.58 152.84,47.85 153.32,47.37 153.6,47.37 D1.4
DP
  Top 0.15: 165.09,54.08 164.54,54.08 J2.A6 | 165.09,54.08 165.3,54.29 165.3,54.78 165.09,54.98 164.54,54.98 J2.B6 | D1.6 153.67,49.17 162.67,49.17 163.98,47.85 166.13,47.85 166.48,48.2 166.48,52.63 165.09,54.02 165.09,54.08
EPD_3V3  (via drill 0.3)
  Top 0.3: J1.16 83.31,15.37 83.31,14.89 83.1,14.68 79.08,14.68 78.11,15.65 78.11,26.66 C7.1 | Q2.2 73.96,26.94 77.77,26.94 77.97,26.73 C7.1 | 81.99,31.72 81.02,31.72 80.95,31.58 v80.75,31.37 | 81.99,31.72 86.08,31.72 102.49,15.3 105.04,15.3 EPD_3V3.TP | 81.99,31.72 L1.2 | v77.84,28.46 77.84,27.08 C7.1
  Bottom 0.3: v80.75,31.37 v77.84,28.46
EPD_3V3_C  (via drill 0.3)
  Top 0.3: Q2.1 73.89,28.95 73.61,29.22 70.5,29.22 69.87,28.6 69.6,28.6 R_CL1.1 69.39,28.6 67.38,28.6 52.22,43.77 EPD_3V3_C.TP 52.08,43.9 v51.11,44.87 | v24.31,59.21 20.57,62.95 20.57,63.29 U2.18
  Bottom 0.3: v24.31,59.21 27.08,59.21 36.01,50.28 45.7,50.28 v51.11,44.87
EPD_BUSY  (via drill 0.3)
  Top 0.15: v86.08,14.13 86.84,14.89 86.84,15.37 J1.9 | v20.08,17.52 13.92,23.68 EPD_BUSY.TP | v10.32,60.94 10.32,63.29 U2.26
  Bottom 0.15: v86.08,14.13 68.9,14.13 65.51,17.52 v20.08,17.52 20.08,17.59 10.18,27.49 10.18,48.48 10.32,48.61 v10.32,60.94
EPD_CS  (via drill 0.3)
  Top 0.15: v84.9,14.61 85.32,15.03 85.32,15.37 J1.12 | v75.69,22.92 75.69,24.1 D6.2 | R9.1 71.12,25.76 v68.28,22.92 68.21,22.92 66.48,21.19 43.9,21.19 43.63,21.47 v43.07,21.47 | v20.57,41.9 20.57,45.84 U2.11 | v76.94,11.49 72.44,6.99 72.44,6.37 EPD_CS.TP
  Bottom 0.15: v68.28,22.92 v75.69,22.92 82.89,15.72 83.45,15.72 84.55,14.61 v84.9,14.61 87.25,14.61 88.57,13.3 88.57,13.02 87.05,11.49 v76.94,11.49 | v20.57,41.9 20.57,41.2 40.3,21.47 v43.07,21.47
EPD_DC  (via drill 0.3)
  Top 0.15: v73.54,18 77.42,14.13 85.04,14.13 85.8,14.89 85.8,15.37 J1.11 | v27.29,18 17.66,27.63 EPD_DC.TP | v12.95,42.45 12.95,45.84 U2.5
  Bottom 0.15: v73.54,18 v27.29,18 27.29,18.07 12.95,32.41 v12.95,42.45
EPD_RST  (via drill 0.3)
  Top 0.15: v84.97,13.64 86.28,14.96 86.28,15.37 J1.10 | v35.59,17.04 35.59,18.7 34.83,19.46 EPD_RST.TP 34.76,19.53 32.69,21.61 v32.69,34.35 | v16.76,54.5 16.76,63.29 U2.21
  Bottom 0.15: v84.97,13.64 68.97,13.64 65.58,17.04 v35.59,17.04 | v16.76,54.5 16.76,50.28 v32.69,34.35
FLASH_CS  (via drill 0.3)
  Top 0.15: R5.1 39.4,47.64 40.58,47.64 41.9,48.96 D9.2 41.9,49.03 v41.9,53.05 | 39.96,57.76 33.45,57.76 21.81,46.12 21.81,45.91 U2.12 | 39.96,57.76 41.76,57.76 U1.1 | 39.96,57.76 v39.96,54.98
  Bottom 0.15: v39.96,54.98 v41.9,53.05
GDR  (via drill 0.3)
  Top 0.15: v87.6,12.67 88.22,12.67 90.3,14.75 90.3,15.37 J1.2 | v66.76,14.4 66.76,15.17 66.69,15.23 R4.2 66.62,15.3 65.72,15.3 64.33,16.69 64.13,16.69 Q3.1
  Bottom 0.15: v87.6,12.67 68.49,12.67 v66.76,14.4
GND  (via drill 0.3, 0.35)
  Top 0.15: IC1.3 48.2,100.69 49.93,100.69 50.41,101.17 52.15,101.17 52.35,100.97 C_DELAY.2 52.42,100.97 55.19,100.97 62.33,108.1 CHANGE_BUTTON.1 | C10.2 67.24,107.34 66.62,107.34 65.79,108.17 CHANGE_BUTTON.2 65.72,108.17 62.26,108.17 CHANGE_BUTTON.1 | CHANGE_BUTTON.1 62.19,108.24 61.91,108.24 60.94,109.21 59.9,109.21 58.03,107.34 52.28,107.34 C5.2 52.22,107.34 51.59,107.34 50.76,108.17 RESET_BUTTON.2 50.69,108.17 47.3,108.17 RESET_BUTTON.1 47.23,108.17 46.4,108.17 46.12,107.89 28.53,107.89 27.98,107.34 C6.2 27.91,107.34 26.59,107.34 25.76,108.17 BOOT_BUTTON.2 25.69,108.17 24.79,108.17 | U2.29_8 14.82,53.05 14.82,51.87 U2.29_7 14.75,51.87 13.57,51.87 U2.29_4 13.5,51.87 12.4,51.87 U2.29_1 | U2.29_1 12.33,51.87 12.33,53.05 U2.29_2 | U2.29_5 13.5,53.05 12.4,53.05 U2.29_2 | 9.73,49.27 12.26,51.8 U2.29_1 | 9.73,49.27 7.89,47.44 7.89,45.91 U2.1 | U2.29_3 12.33,54.36 13.5,54.36 U2.29_6 13.57,54.36 14.75,54.36 U2.29_9 | U2.29_3 12.33,54.43 7.89,58.86 7.89,63.29 U2.28 7.83,63.43 7.83,76.45 2.01,82.27 J4.G3 2.01,82.34 2.01,85.73 | U2.29_2 12.33,53.18 12.33,54.29 U2.29_3 | J4.G4 2.98,95.43 2.98,95.15 5.47,92.66 5.61,92.66 J4.P6 5.47,92.59 2.01,89.12 2.01,85.73 | 24.79,108.17 22.3,108.17 BOOT_BUTTON.1 | C9.2 11.49,99.65 14.34,99.65 14.96,99.03 D8.1 | D8.1 15.03,98.89 15.03,92.24 16.2,91.06 J4.G2 16.27,91 17.04,90.23 17.04,87.12 16.27,86.36 16.27,85.32 J4.G1 16.2,85.73 2.01,85.73 | 24.79,108.17 24.79,103.32 20.36,98.89 15.1,98.89 D8.1 | 82.55,20.98 83.52,20.98 EPD_C10.2 83.58,20.98 85.25,20.98 EPD_C9.2 | 82.55,20.98 81.78,20.98 EPD_C11.2 81.65,20.98 79.43,23.2 79.43,26.66 C7.2
  Top 0.15: EPD_C8.2 86.91,20.98 88.64,20.98 EPD_C7.2 88.78,20.98 90.51,20.98 EPD_C6.2 90.65,20.98 92.45,20.98 EPD_C5.2 92.52,20.91 92.52,20.77 93.21,20.08 93.21,18.42 91.2,16.41 91.2,16.34 | v83.24,16.2 82.89,15.86 82.89,15.44 J1.17 | 87.29,15.82 87.32,15.79 87.32,15.44 J1.8 87.32,15.37 87.32,14.75 85.52,12.95 78.39,12.95 J1.MP2 78.32,12.95 77.97,12.95 73.06,17.87 73.06,19.04 72.44,19.67 EPD_C1.2 | 87.29,15.82 v86.91,16.2 | 91.2,16.34 91.83,15.72 91.83,12.95 J1.MP1 | 91.2,16.34 87.81,16.34 87.29,15.82 | v80.33,18.91 80.05,19.18 80.05,19.67 EPD_C12.1 | v82.55,20.91 82.55,20.98 | D12.1 44.53,27.29 D11.1 44.53,27.21 41.97,27.21 D10.1 41.9,27.15 39.4,24.65 | 39.4,24.65 34.35,24.65 GND.TP 34.62,24.72 v34.62,25.97 | D6.1 74.17,24.1 74.17,21.47 72.44,19.74 EPD_C1.2 | EPD_C1.2 72.37,19.74 69.87,19.74 EPD_C2.2 69.8,19.67 68,17.87 68,15.3 R4.1 67.93,15.23 67.93,11.56 66.06,9.7 66.06,9.56 R2.1 66,9.49 65.3,9.49 64.96,9.14 63.57,9.14 62.74,9.97 62.74,10.11 SJ1.1 62.67,10.18 51.73,10.18 39.4,22.51 39.4,24.65 | v91,50.69 90.92,50.69 90.23,51.38 C8.2 | v91.62,49.79 92.59,49.79 92.66,49.72 C10_SUPERCAP.1 | 68.97,39.75 68.97,38.85 70.98,36.84 76.94,36.84 D3.1 | 68.97,39.75 77.91,48.68 82.27,48.68 82.44,48.86 | 82.44,48.86 83.17,49.58 83.17,49.93 U3.13 | 82.44,48.86 v82.55,48.75 | 42.59,54.02 43.9,54.02 45.7,55.82 U1.9 45.77,55.82 50,55.82 66.06,39.75 68.97,39.75 | 42.59,54.02 41.83,54.02 U1.4 | 42.59,54.02 42.59,48.41 41.97,47.78 41.97,47.58 D9.1 41.9,47.44 34,39.54 34,27.77 GND_2.TP 33.93,27.7 33.66,27.42 v33.66,26.38 | U4.4 133.65,53.88 134,53.88 134.55,54.43 134.55,54.57 U4.9
  Top 0.15: U4.9 134.55,54.64 134.55,54.78 134,55.33 133.65,55.33 U4.1 133.58,55.33 133.31,55.33 | U4.6 135.59,54.36 134.55,54.36 U4.9 | 128.87,53.53 128.87,54.43 129.5,55.05 129.5,55.19 C1_BAT.2 | 128.87,53.53 129.01,53.39 131.37,53.39 | 114.89,40.65 114.89,36.84 C1_BAT2.2 | 114.89,40.65 114.33,41.2 R1_PWRUSB.1 | 122.5,43.77 121.64,42.9 | 121.64,42.9 120.7,41.97 120.56,41.97 IC4.2 | 122.5,46.95 122.5,43.77 | 122.5,46.95 123.13,47.58 C2_BAT.2 123.2,47.71 124.79,47.71 126.59,49.51 126.59,50.21 126.03,50.76 125.83,50.76 MCP73831.2 125.76,50.83 125.48,50.83 124.93,51.38 124.93,52.49 125.97,53.53 128.87,53.53 | 116.65,51.76 121.47,46.95 122.5,46.95 | 116.65,51.76 116.41,52.01 116.2,52.01 R2_BAT.1 | 122.5,43.77 123.47,43.77 125.07,42.17 128.25,42.17 C3.- 128.32,42.17 v130.19,42.17 | 114.89,40.65 115.44,40.65 117.1,42.31 118.9,42.31 120.01,43.42 121.12,43.42 121.64,42.9 | 149.09,47.64 149.65,48.2 151.1,48.2 D1.2 | 149.09,47.64 148.61,47.64 R2-USB.2 148.54,47.58 143.56,42.59 132.13,42.59 C1_BAT1.2 132.06,42.59 v131.23,42.59 | 149.09,47.64 149.09,47.58 151.45,45.22 151.45,44.57 C5_USB.2 151.77,42.97 151.73,42.94 C4_USB.2 151.66,42.94 150.9,42.94 149.16,41.2 149.16,37.4 149.79,36.77 167.79,36.77 | C1.2 154.98,5.75 156.16,5.75 C2.2 156.16,5.82 156.16,9 156.3,9.14 156.3,9.21 | 156.3,9.21 155.81,9.7 SENSOR2.7 155.81,10.04 155.81,11.01 155.05,11.77 155.05,12.88 SENSOR2.1 | 156.3,9.21 156.92,9.21 157.41,9.7 157.41,9.97 SENSOR2.5 157.47,9.97 164.95,17.45 165.3,17.45 J3.1 165.37,17.52 165.65,17.52 167.79,19.67 167.79,36.77 | 163.91,50.34 164.47,50.9 J2.A1 | 163.91,50.34 163.78,50.21 156.23,50.21 R2-USB1.1
  Top 0.15: J2.B12 164.54,51.24 164.54,50.97 J2.A1 | 163.91,50.34 165.02,49.24 J2.MP3 | J2.B1 164.54,57.41 164.54,57.62 J2.A12 164.54,57.69 164.54,58.86 165.02,59.35 J2.MP4 165.09,59.35 168.9,59.35 J2.MP2 168.97,59.35 168.97,50.76 | 168.97,50.76 168.97,49.24 J2.MP1 168.97,49.17 167.79,47.99 167.79,36.77 | v165.99,50.76 165.37,50.76 165.16,50.97 164.61,50.97 J2.A1 | v168.9,50.76 168.97,50.76 | 116.65,51.76 v116.06,51.18 | v10.66,48.34 9.73,49.27
  Top 0.152: 131.37,53.39 131.7,53.72 131.7,54.4 132.4,55.1 132.4,55.2 132.53,55.33 133.31,55.33
  Bottom 0.15: v86.91,16.2 v83.24,16.2 83.17,16.2 80.47,18.91 v80.33,18.91 80.54,18.91 v82.55,20.91 | 91,50.41 v91,50.69 | 91,50.41 v91.62,49.79 114.68,49.79 v116.06,51.18 | 91,50.41 84.21,50.41 v82.55,48.75 | v34.62,25.97 34.07,25.97 v33.66,26.38 32.62,26.38 v10.66,48.34 | v168.9,50.76 v165.99,50.76 | v130.19,42.17 130.81,42.17 v131.23,42.59
  other vias: 2.7,98.3 20.2,66.1 26.4,67.3 19.7,55.9 31.6,48 60.7,62.6 160.5,47.2 15.8,61.3 24.1,50.1 18.7,42.4 46,25.1 147.3,41.9 96.2,52.6 68.9,53.2 72.8,60.1 39.7,26.2 75.5,20.8 67.6,17.3 17.1,48.5
  pour Top: 92.06,8.24 92.08,8.22 92.08,-0.67 93.83,-2.42 172.17,-2.42 172.72,-1.87 172.72,69.12 172.44,68.84 172.42,68.82 93.78,68.82 93.76,68.84 93.74,68.86 93.72,68.88 93.72,112.27 93.17,112.82 -2.52,112.82 -3.72,-1.57 -3.47,-1.82 77.82,-1.82 77.54,-1.54 77.52,-1.52 77.52,8.22 77.54,8.24 77.86,8.56 77.88,8.58 91.72,8.58 91.74,8.56
  pour Bottom: 98.38,70.12 98.36,70.14 98.04,70.46 98.02,70.48 98.02,111.37 94.67,114.72 -4.02,114.72 -5.22,-3.67 -4.97,-3.92 174.12,-3.92 173.94,-3.74 173.92,-3.72 173.92,69.27 173.07,70.12
GPIO8
  Top 0.15: R1.1 15.3,42.59 16.27,42.59 19.25,45.57 19.25,45.84 U2.10
I2C_PW  (via drill 0.3)
  Top 0.15: R2-PINH.2 157.61,4.43 R1_PINH.2 157.47,4.43 156.23,4.43 C2.1 156.16,4.43 154.98,4.43 C1.1 154.91,4.5 154.91,4.64 154.22,5.33 154.22,9.14 154.98,9.9 SENSOR2.8 154.98,9.97 154.98,11.43 154.5,11.91 154.5,13.09 | 154.5,13.09 154.5,13.43 154.7,13.64 155.33,13.64 155.74,13.23 155.74,12.95 SENSOR2.2 155.88,12.88 155.88,12.6 156.57,11.91 156.57,9.97 SENSOR2.6 | v25,59.9 21.81,63.09 21.81,63.29 U2.17 | v154.36,13.09 154.5,13.09
  Bottom 0.15: v25,59.9 26.94,59.9 36.15,50.69 79.98,50.69 117.59,13.09 v154.36,13.09
INT_RTC  (via drill 0.3)
  Top 0.15: 90.58,59 88.99,59 87.53,57.55 85.87,57.55 84.48,58.93 84.48,59.21 U3.3 | 90.58,59 91.41,59 R1_PINH1.1 | 90.58,65.44 100.83,65.44 102.08,64.19 INT_RTC.TP | 90.58,65.44 36.08,65.44 16.76,46.12 16.76,45.91 U2.8 | v90.58,60.39 90.58,59 | v90.58,65.37 90.58,65.44
  Bottom 0.15: v90.58,65.37 v90.58,60.39
IO/BOOT  (via drill 0.3)
  Top 0.15: C6.1 27.91,108.65 26.8,108.65 BOOT_BUTTON.3 25.69,109.69 22.3,109.69 BOOT_BUTTON.4 22.23,109.69 21.33,108.79 21.33,108.52 20.36,107.55 20.36,107.34 R_BOOT.1 20.43,107.34 v24.31,103.46 | v24.31,73.13 24.31,63.36 U2.15
  Bottom 0.15: v24.31,103.46 v24.31,73.13
IO/CHANGE  (via drill 0.3)
  Top 0.15: C10.1 67.24,108.65 66.83,108.65 65.79,109.69 CHANGE_BUTTON.3 65.72,109.69 CHANGE_BUTTON.4 62.19,109.62 v61.15,109.62 | v61.15,108.03 60.45,107.34 R_CHANGE.1 | v46.95,96.4 14.2,63.64 U2.23
  Bottom 0.15: v61.15,109.62 v61.15,108.03 61.08,108.03 49.44,96.4 v46.95,96.4
MISO  (via drill 0.3)
  Top 0.15: 43,26.45 40.3,23.75 40.3,22.92 40.51,22.71 41.55,22.71 41.62,22.78 45.08,22.78 45.5,22.37 47.85,22.37 R8.1 | 43,26.45 48.2,26.45 48.48,26.73 48.48,28.12 47.85,28.74 D12.2 | v40.16,49.72 40.16,54.57 41.76,56.16 41.76,56.51 U1.2 | v43,26.52 43,26.45 | v17.87,52.77 9.14,61.49 9.14,63.29 U2.27 9.07,63.36 8.93,63.5 v8.93,64.47 | v7.34,92.31 5.96,93.69 J4.P7 | v41.76,19.53 41.76,13.64 36.84,8.73 36.84,6.3 MISO.TP
  Bottom 0.15: v17.87,52.77 32.96,52.77 36.01,49.72 v40.16,49.72 40.16,31.92 43,29.09 v43,26.52 43,26.45 43.56,25.9 43.56,21.33 v41.76,19.53 | v7.34,92.31 7.34,66.06 v8.93,64.47
MOSI  (via drill 0.3)
  Top 0.15: v83.93,14.61 84.28,14.96 84.28,15.37 J1.14 | R7.1 44.46,22.16 44.67,21.95 v45.29,21.95 47.16,21.95 47.37,21.74 48.41,21.74 49.79,23.12 49.79,28.05 48.34,29.5 45.36,29.5 44.6,28.74 D11.2 44.53,28.67 43.84,27.98 41.34,27.98 41.2,28.12 | 41.2,29.5 49.58,37.88 49.58,53.95 U1.5 | 41.2,28.12 41.2,29.5 | v17.04,44.04 15.51,45.57 15.51,45.84 U2.7 | v40.58,30.05 41.13,29.5 41.2,29.5 | v5.05,88.57 5.75,89.26 J4.P3 | 41.2,28.12 36.08,28.12 33.1,25.14 33.1,24.1 36.08,21.12 36.08,16.14 37.6,14.61 37.6,11.29 MOSI.TP
  Bottom 0.15: v83.93,14.61 77.56,14.61 70.22,21.95 v45.29,21.95 | v40.58,30.05 36.36,30.05 22.37,44.04 v17.04,44.04 17.04,44.11 16.27,44.87 16.27,56.51 7.06,65.72 7.06,86.08 5.05,88.09 v5.05,88.57
N$1
  Top 0.15: IC1.5 50.97,102.49 52.15,102.49 52.35,102.28 C_DELAY.1
N$2
  Top 0.15: R2-USB.1 148.61,48.96 149.58,48.96 156.64,56.02 164.47,56.02 J2.B5
N$3
  Top 0.15: R2-USB1.2 156.23,51.45 162.32,51.45 163.91,53.05 164.47,53.05 J2.A5
N$5
  Top 0.15: D7.1 85.32,64.75 85.32,62.6 85.66,62.26 R_CAPACITOR.1
N$6
  Top 0.15: 119.8,40.93 120.5,40.93 IC4.3 120.56,40.93 122.3,40.93 122.78,40.44 129.08,40.44 130.92,42.28 | 119.8,40.93 116.89,40.93 D2.1 | 119.8,40.93 119.8,42.24 120.36,42.8 120.5,42.8 IC4.1 | 130.92,42.28 130.74,42.45 130.74,44.94 134.28,48.48 Q1.2 | 130.92,42.28 131.92,41.27 132.06,41.27 C1_BAT1.1
N$9
  Top 0.15: R1_BAT.2 121.33,50.76 124.58,50.76 125.48,49.86 MCP73831.1
N$10
  Top 0.15: CHG_LED.C 119.94,53.32 119.94,50.83 R1_BAT.1
N$11
  Top 0.15: C4.1 91.41,33.66 86.56,33.66 85.94,34.28 D4.1 85.87,34.35 83.45,36.77 80.54,36.77 D3.2
N$12
  Top 0.15: R2_BAT.2 117.52,52.01 117.66,52.01 119.8,49.86 123.13,49.86 MCP73831.5
N$13
  Top 0.15: J1.24 79.29,15.44 79.29,20.22 79.98,20.91 EPD_C12.2
N$15
  Top 0.15: J1.22 80.4,15.44 80.4,16.55 83.52,19.67 EPD_C10.1
N$17
  Top 0.15: J1.20 81.37,15.44 81.37,16.2 84,18.84 86.01,18.84 86.84,19.67 EPD_C8.1
N$18  (via drill 0.3)
  Top 0.15: v84.14,18.35 81.85,16.07 81.85,15.44 J1.19 | v87.88,19.6 88.57,19.6 88.64,19.67 EPD_C7.1
  Bottom 0.15: v84.14,18.35 85.39,19.6 v87.88,19.6
N$19  (via drill 0.3)
  Top 0.15: v84.76,18.35 82.41,16 82.41,15.44 J1.18 | v89.75,19.6 90.44,19.6 90.51,19.67 EPD_C6.1
  Bottom 0.15: v84.76,18.35 88.5,18.35 v89.75,19.6
N$20
  Top 0.15: J1.15 83.86,15.44 83.86,15.79 87.19,19.11 91.89,19.11 92.45,19.67 EPD_C5.1
N$21
  Top 0.15: J1.4 89.33,15.37 89.33,15.03 86.56,12.26 78.11,12.26 72.44,17.94 72.44,18.35 EPD_C1.1
N$22
  Top 0.15: J1.5 88.85,15.44 88.85,15.79 89.12,16.07 91.06,16.07 91.2,15.93 91.2,14.89 88.29,11.98 76.24,11.98 69.87,18.35 EPD_C2.1
PREVGH
  Top 0.15: J1.21 80.88,15.44 80.88,16.14 83.86,19.11 84.69,19.11 85.25,19.67 EPD_C9.1 85.32,19.74 86.01,20.43 86.01,21.4 85.94,21.47 85.94,30.47 D5.1
PREVGL
  Top 0.15: J1.23 79.84,15.44 79.84,17.8 EPD_C11.1 81.72,19.74 81.02,20.43 81.02,21.05 78.81,23.27 | 78.81,36.42 79.84,37.46 84,37.46 87.12,34.35 89.33,34.35 D4.2
  Top 0.152: 78.81,36.42 78.81,36.09 79.4,35.5 79.4,28.3 78.8,27.7 78.8,23.27 78.81,23.27
RESE  (via drill 0.3)
  Top 0.15: v88.09,13.16 89.82,14.89 89.82,15.37 J1.3 | Q3.2 65.44,16.69 66,16.14 v66,16 67.03,16 67.24,15.79 67.24,14.27 66.89,13.92 65.51,13.92 64.33,12.74 64.13,12.74 R3.2
  Bottom 0.15: v88.09,13.16 68.83,13.16 v66,16
RESE'
  Top 0.15: 65.44,11.43 65.44,12.67 R3.1 | 65.44,11.43 66,10.87 R2.2 | SJ1.2 64.26,10.18 65.44,11.36 65.44,11.43
RESET  (via drill 0.3)
  Top 0.15: C5.1 52.22,108.65 51.8,108.65 RESET_BUTTON.3 50.69,109.69 48.27,109.69 | 48.27,109.69 47.3,109.69 RESET_BUTTON.4 | 46.29,106.75 45.77,107.27 R_RESET.1 | 46.29,106.75 48.13,104.91 IC1.1 48.06,102.63 47.44,102 47.44,81.72 16.97,51.24 14.27,51.24 10.39,47.37 10.39,45.91 U2.3 | v48.27,108.93 48.27,109.69 | 46.29,106.75 v46.81,107.27
  Bottom 0.15: v48.27,108.93 48.27,108.72 v46.81,107.27
RTC_RST  (via drill 0.3)
  Top 0.15: v24.86,61.35 23.13,63.09 23.13,63.29 U2.16 | v81.44,61.35 83.17,59.62 83.17,59.28 U3.4
  Bottom 0.15: v81.44,61.35 v24.86,61.35
RX
  Top 0.15: U2.24 12.95,63.36 12.95,67.59 17.73,72.37 RX.TP
SCK  (via drill 0.3)
  Top 0.15: v85.39,16.69 84.9,16.2 84.9,15.44 J1.13 | v65.3,22.44 50.7,22.44 49.58,22.44 48.61,21.47 44.04,21.47 43.56,21.95 41.06,21.95 R6.1 | U1.6 49.65,55.19 49.65,54.91 50.34,54.22 50.34,37.12 43.46,30.24 41.97,28.74 D10.2 42.31,29.15 v41.9,29.57 | v16.41,43.42 14.2,45.64 14.2,45.84 U2.6 | v4.57,88.16 4.57,90.79 5.26,91.48 5.75,91.48 J4.P5 | v38.23,24.17 38.23,15.79 SCK.TP
  Top 0.152: 43.46,30.24 43.53,30.3 49.6,30.3 50.07,29.83 50.07,23.07 50.7,22.44
  Bottom 0.15: v85.39,16.69 85.18,16.69 83.03,18.84 83.03,21.05 80.68,23.41 66.27,23.41 v65.3,22.44 | v41.9,29.57 38.23,29.57 | 38.23,29.57 36.42,29.57 22.58,43.42 v16.41,43.42 16.41,43.49 16,43.9 16,56.37 6.79,65.58 6.79,85.94 v4.57,88.16 | 38.23,29.57 v38.23,24.17
SCL  (via drill 0.3)
  Top 0.15: R2-PINH.1 158.93,5.68 158.93,5.47 159.55,4.85 159.55,4.02 159.41,3.88 154.36,3.88 153.87,4.36 153.87,13.23 154.57,13.92 156.64,13.92 157.41,13.16 157.41,12.95 SENSOR2.4 157.47,13.16 157.82,13.16 v162.67,18 | v137.18,53.6 135.94,54.85 135.66,54.85 U4.7 | v165.3,25.48 165.3,20.57 J3.4 | v20.22,60.87 18,63.09 18,63.29 U2.20 | v84.42,56.44 84.42,52.84 86.98,50.28 86.98,50 U3.16 87.05,50.28 v88.92,52.15
  Bottom 0.15: v162.67,18 165.3,20.64 v165.3,25.48 v137.18,53.6 137.18,54.85 136.84,55.19 91.96,55.19 v88.92,52.15 | v20.22,60.87 79.98,60.87 v84.42,56.44
SDA  (via drill 0.3)
  Top 0.15: v136.7,54.71 136.08,55.33 135.66,55.33 U4.8 | v164.26,20.29 165.02,19.53 165.3,19.53 J3.3 | v157.61,9.07 157.61,5.75 R1_PINH.1 | v157.27,11.98 156.64,12.6 156.64,12.88 SENSOR2.3 | v22.02,60.39 19.32,63.09 19.32,63.29 U2.19 | v84.62,51.38 85.66,50.34 85.66,50 U3.15
  Bottom 0.15: 136.7,51.66 136.7,47.85 v164.26,20.29 164.26,20.22 157.61,13.57 157.61,11.98 | 136.7,51.66 v136.7,54.71 | 157.61,11.98 v157.61,9.07 | 157.61,11.98 v157.27,11.98 | v22.02,60.39 26.87,60.39 35.87,51.38 v84.62,51.38 84.69,51.38 84.97,51.66 136.7,51.66
SRC  (via drill 0.3)
  Top 0.15: D5.2 89.4,30.47 92.1,33.17 92.1,34.07 91.48,34.69 91.48,34.9 C4.2 91.41,34.97 86.91,34.97 84.14,37.74 79.71,37.74 78.32,36.36 77.45,33.3 L1.1 77.42,31.43 v76.45,30.47 | v73.06,27.08 64.82,18.84 Q3.3
  Bottom 0.15: v76.45,30.47 v73.06,27.08
SS_SD  (via drill 0.3)
  Top 0.15: D8.2 13.5,99.03 10.94,99.03 10.32,99.65 8.93,99.65 R10.1 8.93,99.58 8.93,90.92 6.23,88.22 J4.P2 6.23,88.16 6.79,87.6 6.79,86.63 6.37,86.22 v5.89,86.22 | v11.63,47.99 11.63,45.91 U2.4
  Bottom 0.15: v11.63,47.99 11.63,60.32 5.89,66.06 v5.89,86.22
TX
  Top 0.15: U2.25 11.7,63.36 11.7,71.4 12.67,72.37 TX.TP
USB_D+  (via drill 0.3)
  Top 0.15: v137.74,55.95 145.36,48.34 149.37,48.34 150.2,49.17 151.1,49.17 D1.1 | v34.42,55.95 24.38,45.91 U2.14
  Bottom 0.15: v34.42,55.95 v137.74,55.95
USB_D-  (via drill 0.3)
  Top 0.15: v149.93,47.37 151.1,47.37 D1.3 | v32.41,55.47 23.13,46.19 23.13,45.91 U2.13
  Bottom 0.15: v149.93,47.37 145.08,47.37 136.98,55.47 v32.41,55.47
VBAT  (via drill 0.3)
  Top 0.3: U4.2 133.65,54.85 133.65,54.36 U4.3 133.51,54.29 133.17,54.29 132.96,54.08 132.96,53.6 133.31,53.25 133.31,50.69 Q1.3 133.17,50.9 127.14,50.9 127,50.83 | 127,50.83 127,49.38 124.03,46.4 123.2,46.4 C2_BAT.1 | 127,50.83 126.1,51.73 125.83,51.73 MCP73831.3 125.69,51.87 125.48,52.08 v125.48,52.42 | v123.2,54.71 123.2,62.19 VBAT.TP
  Bottom 0.3: v125.48,52.42 v123.2,54.71
VBUS  (via drill 0.3)
  Top 0.3: 152.42,49.72 158.24,55.54 164.47,55.54 J2.A8 | 152.42,46.67 152.42,44.94 152.9,44.46 C5_USB.1 152.84,44.22 152.84,43.14 153.04,42.94 C4_USB.1 153.04,42.73 154.63,41.13 154.63,39.33 PFMF.050.1.2 | 152.42,46.67 152.42,49.72 | 152.42,46.67 154.36,46.67 154.57,46.88 154.57,47.71 154.08,48.2 153.67,48.2 D1.5 | 115.51,42.59 116.48,42.59 116.83,42.94 D2.2 | 115.51,42.59 114.33,42.59 R1_PWRUSB.2 | 115.51,42.59 115.51,52.63 116.96,54.08 120.7,54.08 121.33,53.46 CHG_LED.A 121.47,53.32 121.6,53.32 123.13,51.8 MCP73831.4 123.27,51.87 123.75,51.87 127.83,55.95 130.05,55.95 130.78,55.23 | 136.12,51.78 137.74,53.39 137.74,54.43 136.35,55.82 | 136.12,51.78 132.89,48.54 132.41,48.54 Q1.1 | 136.35,55.82 131.37,55.82 130.78,55.23 | 130.78,55.23 129.57,54.02 C1_BAT.1 | VBUS.TP 139.68,63.43 139.68,59.21 136.42,55.95 136.35,55.82 | v152,49.79 152.28,49.79 152.42,49.72 | v143.28,49.79 139.91,49.79 137.92,51.78 136.12,51.78
  Bottom 0.3: v143.28,49.79 v152,49.79
VRTC  (via drill 0.3)
  Top 0.3: v87.05,60.66 87.05,62.19 R_CAPACITOR.2 | v91.27,56.44 91.27,53.32 92.59,52.01 C10_SUPERCAP.2 92.66,51.87 92.66,51.59 91.2,50.14 90.23,50.14 C8.1 90.03,50.14 88.5,48.61 85.39,48.61 84.48,49.51 84.48,49.93 U3.14
  Bottom 0.3: v91.27,56.44 v87.05,60.66
VUSB  (via drill 0.3)
  Top 0.3: J2.A4 164.54,51.8 164.54,52.01 J2.B9 164.68,52.08 165.16,52.08 v165.44,52.35 | J2.A9 164.54,56.78 164.54,56.58 J2.B4 164.68,56.51 165.16,56.51 v165.44,56.23 165.51,56.09 165.51,55.12 166.89,53.74 166.89,48.06 156.02,37.19 152.28,37.19 150.2,39.27 PFMF.050.1.1
  Bottom 0.3: v165.44,56.23 v165.44,52.35
(copper drawn outside any net)
  shapes: Top area x12